# Altium PCB analog_breakout_IMU.PcbDoc
Units mil, origin at the board's own origin, x right, y up, seen from the top; angles counter-clockwise.
Board outline 1350 x 2525 mil, 4 copper layers (Top Layer, Layer 1, Layer 2, Bottom Layer), stack 22.378 mil thick; 81 components, 75 nets, 356 pads, 135 vias.
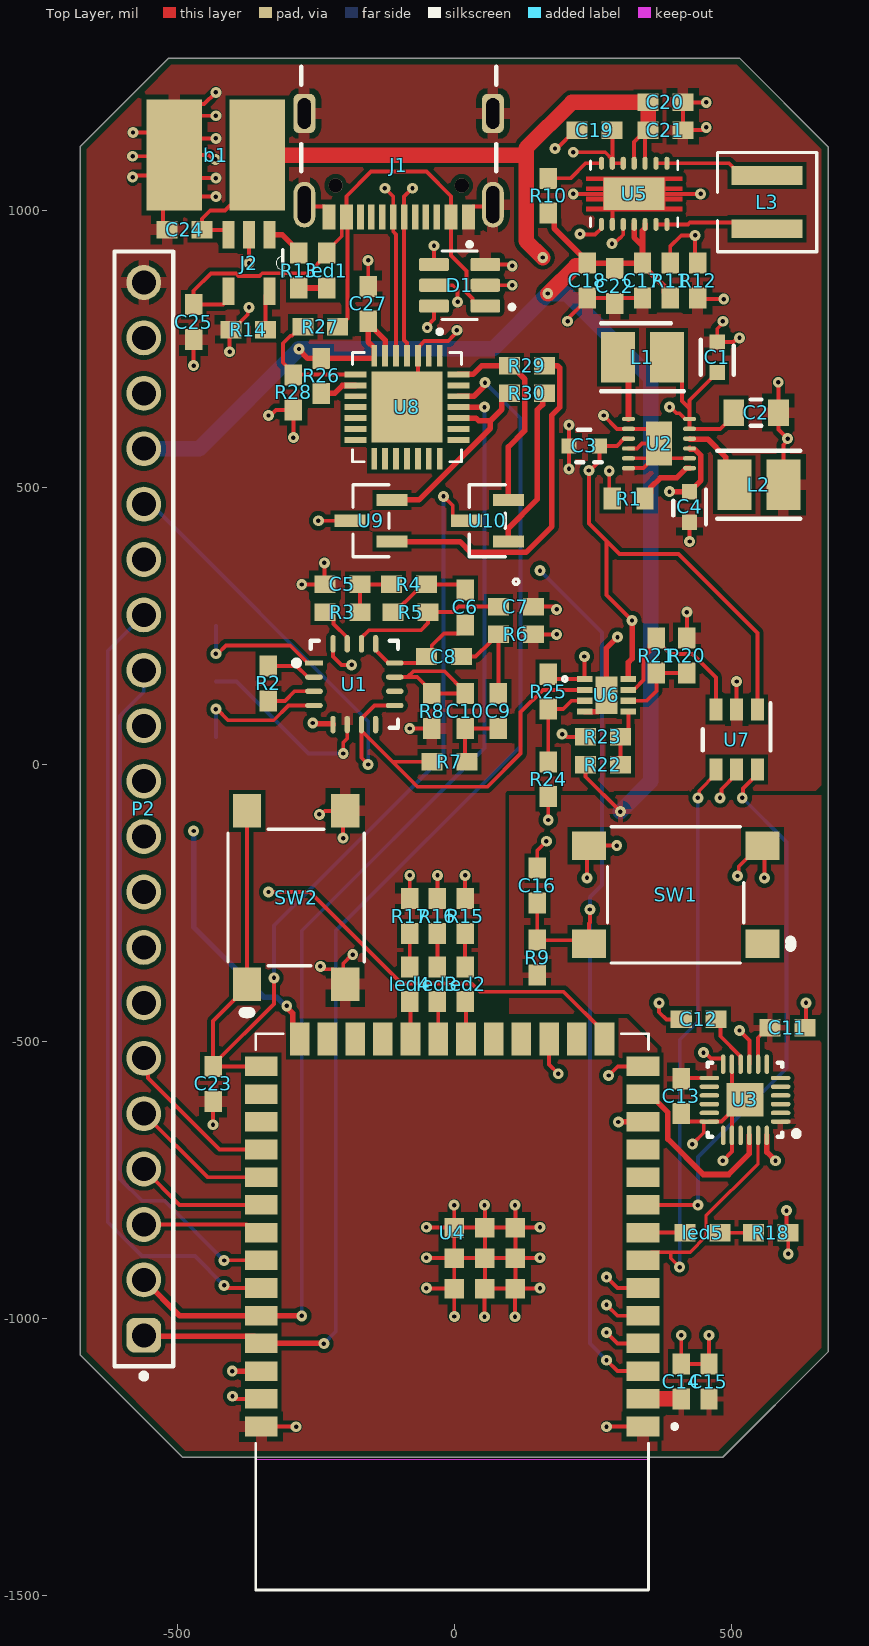
[diagram p0: Top Layer view]
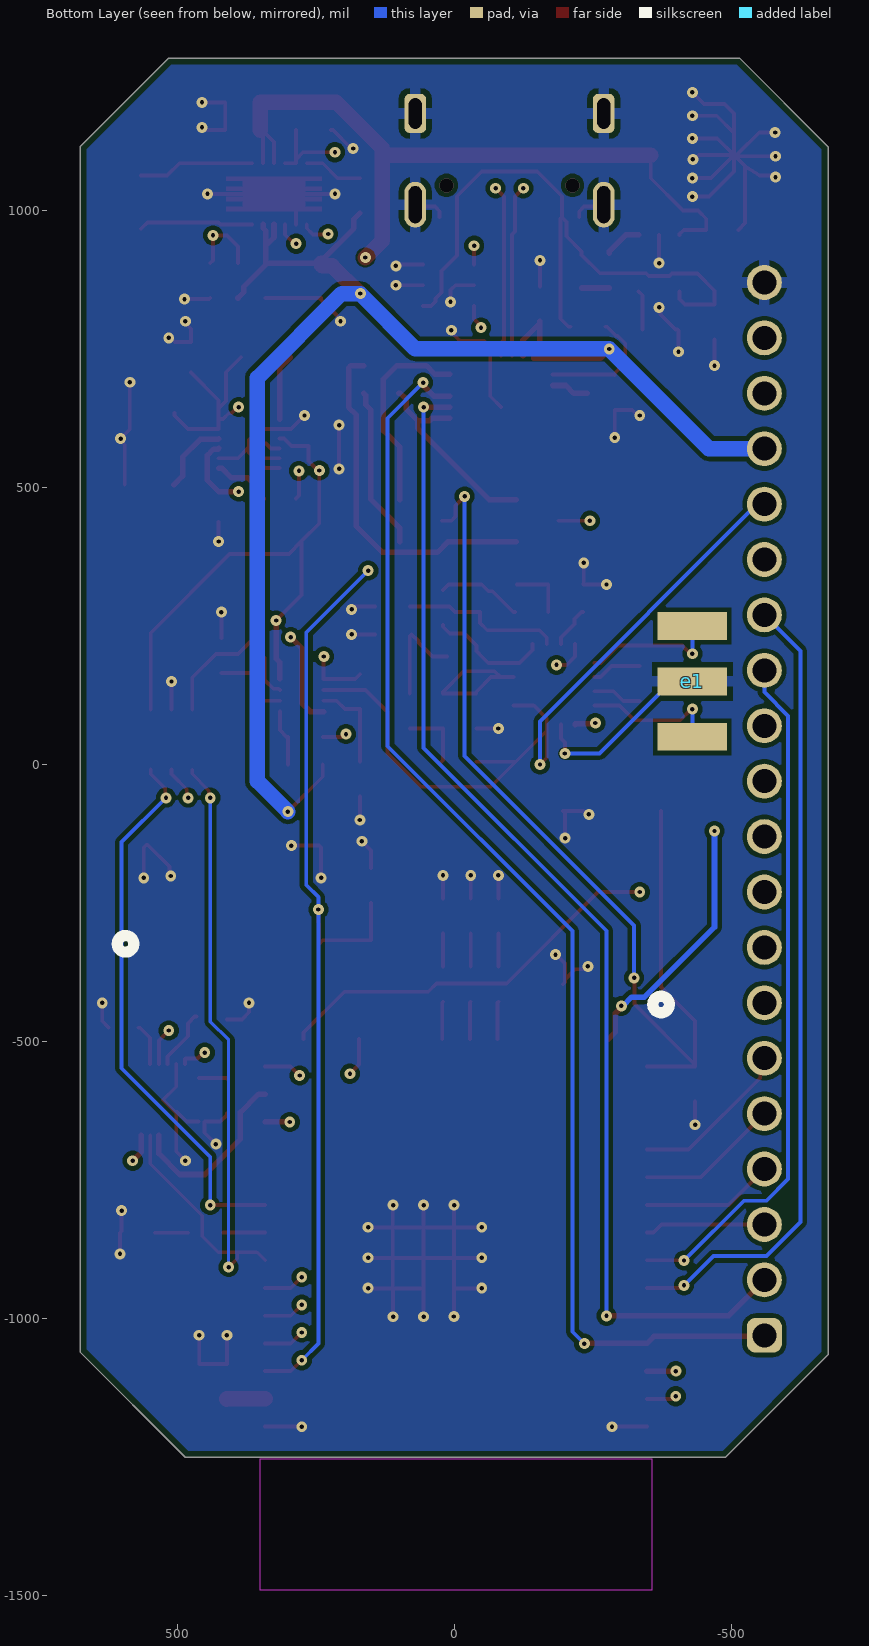
[diagram p1: Bottom Layer view, seen from below]
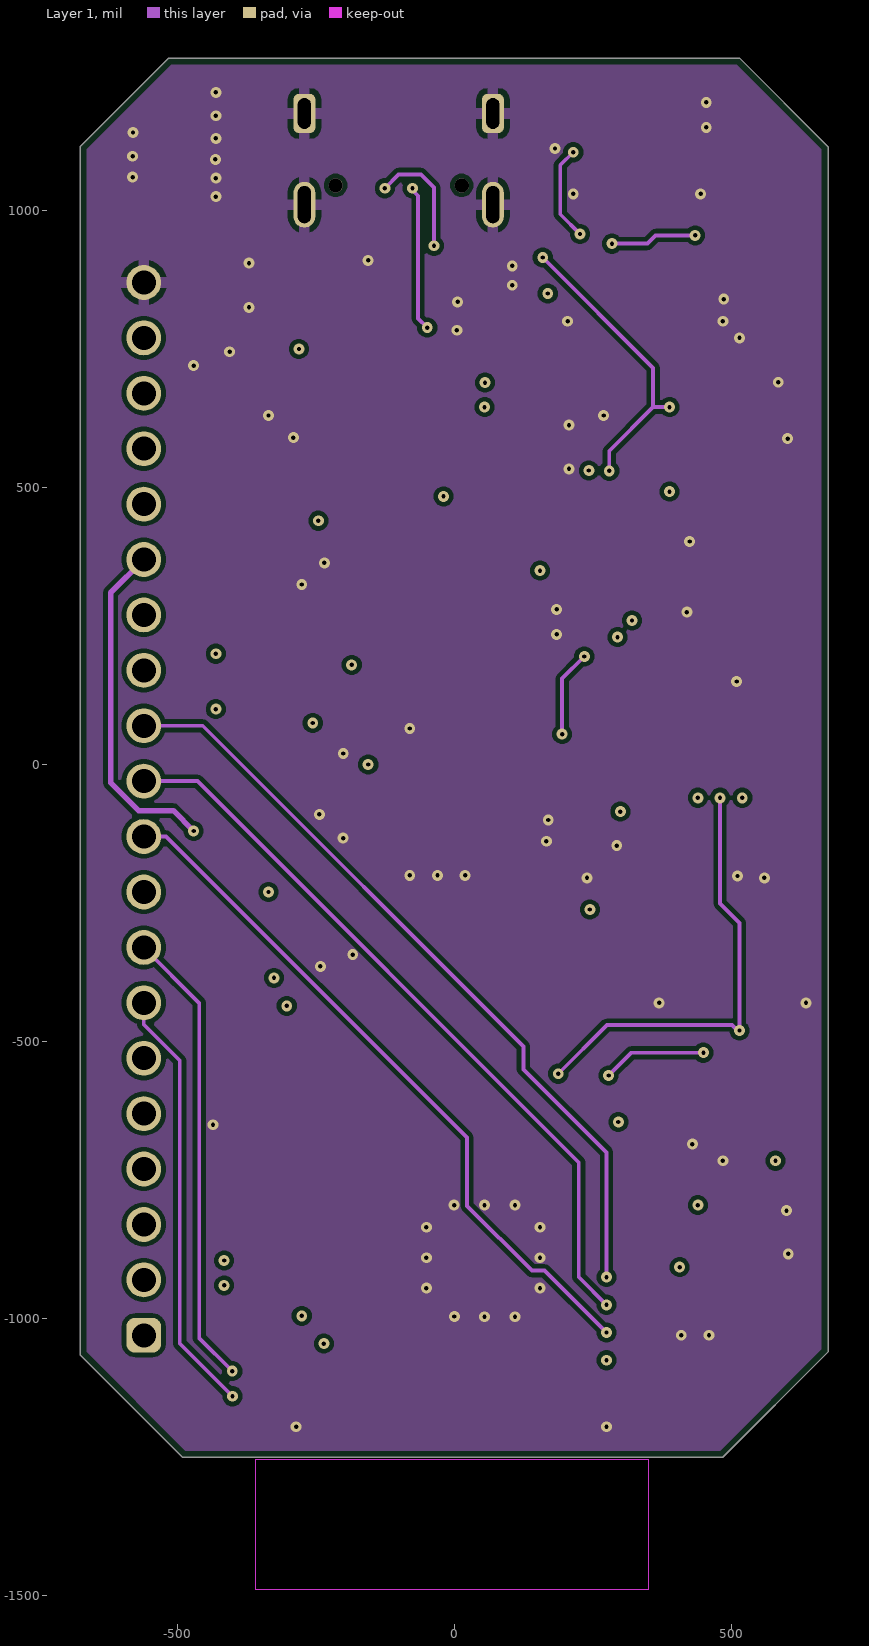
[diagram p2: Layer 1]
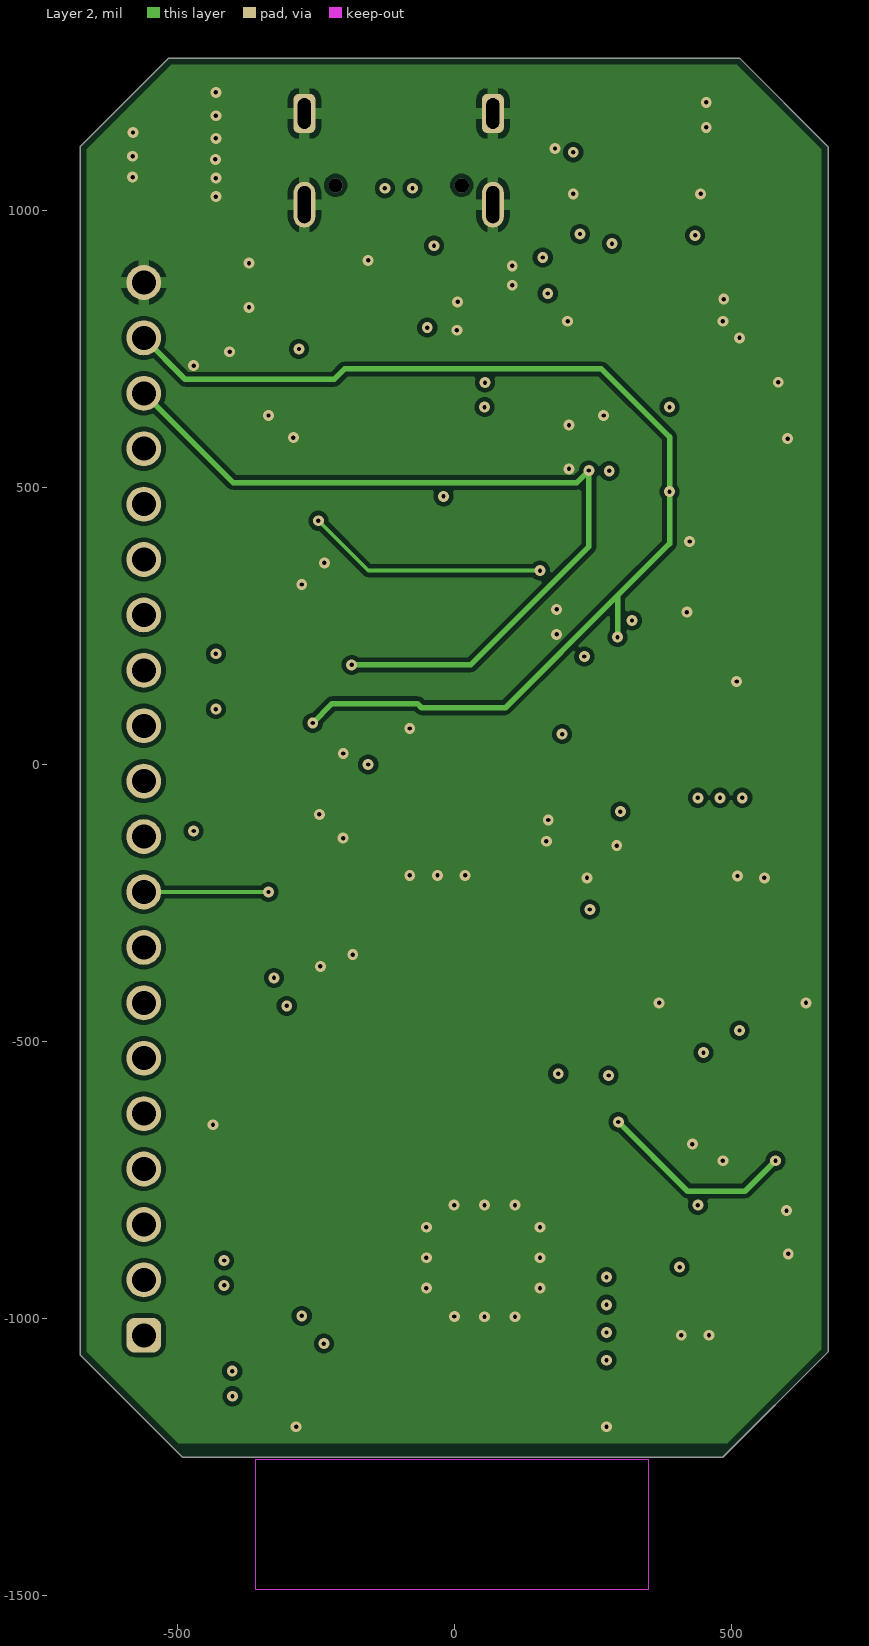
[diagram p3: Layer 2]

## Layer stack, top to bottom
Top Solder: solder mask 0.4, Solder Resist, Dk 3.5
Top Layer: signal copper 1.4
Dielectric 2: prepreg 2.8, PP-006, Dk 4.1
Layer 1: signal copper 0.689
Dielectric 1: dielectric 12.6, FR-4, Dk 4.8
Layer 2: signal copper 0.689
Dielectric 3: prepreg 2.8, PP-006, Dk 4.1
Bottom Layer: signal copper 1.4
Bottom Solder: solder mask 0.4, Solder Resist, Dk 3.5

## Board outline
-675,-1065 -675,1115 -515,1275 515,1275 675,1115 675,-1060 485,-1250 -490,-1250

## Design rules (kind name [scope] priority, off if disabled: settings)
BoardOutlineClearance [All] p1: gap=11.81 ignorepadtopadclearanceinfootprint=FALSE except(15.75: Arc-SplitBarrior Arc-SplitContinuation Track-SplitBarrior Track-SplitContinuation SMDPad-SplitBarrior SMDPad-SplitContinuation THPad-SplitBarrior THPad-SplitContinuation Via-SplitBarrior Via-SplitContinuation Fill-SplitBarrior Fill-SplitContinuation Poly-SplitBarrior Poly-SplitContinuation Region-SplitBarrior Region-SplitContinuation Text-SplitBarrior Text-SplitContinuation)
Clearance "Clearance Different Nets" [All] p1: gap=7.87 ignorepadtopadclearanceinfootprint=FALSE except(3.5: Arc-Arc Arc-Track Arc-SMDPad Track-Track Track-SMDPad; 5: SMDPad-SMDPad SMDPad-Via THPad-Via Via-Via; 10: Arc-Via Arc-Text Track-Via Track-Text SMDPad-Text THPad-Text Via-Text Fill-Text Poly-Text Region-Text Text-Text; 19.68: THPad-THPad Via-Hole)
Clearance "Clearance Same Nets" [All] p2: gap=7.87 ignorepadtopadclearanceinfootprint=FALSE except(3.5: Arc-Arc Arc-Track Arc-SMDPad Track-Track Track-SMDPad SMDPad-SMDPad; 5: SMDPad-Via THPad-Via; 10: Arc-Via Arc-Text Track-Via Track-Text SMDPad-Text THPad-Text Via-Via Via-Text Fill-Text Poly-Text Region-Text Text-Text)
Clearance "Clearance Bottom Layer" [OnLayer('Bottom Layer')] p3: gap=8 ignorepadtopadclearanceinfootprint=TRUE except(10: Arc-Text Track-Text SMDPad-Text THPad-Text Via-Text Fill-Text Poly-Text Region-Text Text-Text)
Clearance "Clearance Top Layer" [OnLayer('Top Layer')] p4: gap=8 ignorepadtopadclearanceinfootprint=TRUE except(10: Arc-Text Track-Text SMDPad-Text THPad-Text Via-Text Fill-Text Poly-Text Region-Text Text-Text)
HoleSize [All] p1: absolutevalues=TRUE maxlimit=248.03 minlimit=7.87 maxpercent=80.000 minpercent=20.000
MinimumAnnularRing [All] p1: minimumring=5.12
MinimumSolderMaskSliver [All] p1: minsoldermaskwidth=3.94
PolygonConnect PolygonConnect_2 [All vs IsNamedPolygon('3V3_L01_P010')] p1: connectstyle=Relief reliefconductorwidth=10 reliefentries=4 polygonreliefangle="90 Angle" airgapwidth=10
PolygonConnect [All vs IsNamedPolygon('3V3_L01_P010')] p2: connectstyle=Direct reliefconductorwidth=10 reliefentries=4 polygonreliefangle="90 Angle" airgapwidth=10
PolygonConnect PolygonConnect_1 [All] p3: thpad.connectstyle=Relief thpad.reliefconductorwidth=20 thpad.reliefentries=4 thpad.polygonreliefangle="90 Angle" thpad.airgapwidth=10 smdpad.connectstyle=Relief smdpad.reliefconductorwidth=20 smdpad.reliefentries=4 smdpad.polygonreliefangle="90 Angle" smdpad.airgapwidth=10 via.connectstyle=Direct via.reliefconductorwidth=20 via.reliefentries=4 via.polygonreliefangle="90 Angle" via.airgapwidth=10
RoutingCorners [All] p1: cornerstyle=Round minsetback=100 maxsetback=100
RoutingVias [All] p1: holewidth=19.68 width=39.37 viastyle="Through Hole" minholewidth=7.87 minwidth=13.78 maxholewidth=39.37 maxwidth=78.74
SilkToSilkClearance [All] p1: silktosilkclearance=3.94
SilkToSolderMaskClearance [IsPad] p1: minsilkscreentomaskgap=3.94 clearancetoexposedcopper=TRUE
SolderMaskExpansion [All] p1: expansion=4 istentingtop=FALSE
SupplyNets "Schematic Supply Nets" [InNet('gnd')] p1: voltage=0.000
Width [All] p1: maxlimit=100 minlimit=3.5 preferedwidth=15
25 further rules are at their usual default settings.

## Classes and differential pairs
component class usb: C27 R26 R27 R28 R29 R30 U8 U9 U10
component class esp32: b1 C14 C15 C16 C17 C18 C19 C20 C21 C22 C23 C24 C25 D1 J1 J2 L3 led1 led2 led3 led4 led5 R9 R10 R11 R12 R13 R14 R15 R16 R17 R18 SW1 SW2 U4 U5 U7
component class analog: " " C1 C2 C3 C4 C5 C6 C7 C8 C9 C10 C11 C12 C13 e1 L1 L2 P2 R1 R2 R3 R4 R5 R6 R7 R8 R20 R21 R22 R23 R24 R25 U1 U2 U3 U6

## Components (designator, comment, footprint, x,y, rotation, side; value= is the part's Value field where it differs from the comment)
b1 "battery pad" bat_pads -455,1100 r270 top
C1 "10u" FP-C1608-080-0_1-MFG 475,735 r90 top
C2 "100n" FP-CGA3E-0_3-0_1-IPC_A 545,635 r0 top
C3 "10u" FP-C1608-080-0_1-MFG 235,575 r0 top
C4 "10u" FP-C1608-080-0_1-MFG 425,465 r90 top
C5 "genCap" GeneralCap -170,325 r180 top
C6 "genCap" GeneralCap 20,315 r270 top
C7 "genCap" GeneralCap 80,285 r0 top
C8 "genCap" GeneralCap -50,195 r0 top
C9 "genCap" GeneralCap 80,127.99 r270 top
C10 "genCap" GeneralCap 20,65 r90 top
C11 "genCap" GeneralCap 570,-475 r0 top
C12 "genCap" GeneralCap 472.99,-460 r180 top
C13 "genCap" GeneralCap 410,-567.01 r270 top
C14 "genCap" GeneralCap 410,-1145 r90 top
C15 "genCap" GeneralCap 460,-1145 r90 top
C16 "genCap" GeneralCap 150,-250 r90 top
C17 "genCap" GeneralCap 340,905 r270 top
C18 "genCap" GeneralCap 240,905 r270 top
C19 "genCap" GeneralCap 285,1145 r180 top
C20 "genCap" GeneralCap 350,1195 r0 top
C21 "genCap" GeneralCap 350,1145 r0 top
C22 "genCap" GeneralCap 290,895 r270 top
C23 "genCap" GeneralCap -435,-545 r270 top
C24 "genCap" GeneralCap -455,965 r180 top
C25 "genCap" GeneralCap -470,830 r270 top
C27 "genCap" GeneralCap -155,800 r90 top
D1 "ESDA6V1BC6" SOT95P280X145-6N 10,865 r180 top
e1 "electrode" electrode -430,150 r0 bottom
J1 "USB4105-GF-A-120" GCT_USB4105-GF-A-120 -100,1175 r180 top
J2 "MCP73831T-2ACI/OT" SOT95P280X145-5N -370,905 r270 top
L1 "1239AS-H-4R7M=P2" FP-DFE252012C-IPC_A 340,735 r180 top
L2 "1239AS-H-4R7M=P2" FP-DFE252012C-IPC_A 550,505 r0 top
L3 "XFL4020-152MEC" IND_XFL4020_COC 565,1015 r90 top
led1 "led" GeneralCap -230,922.99 r270 top
led2 "led" GeneralCap 20,-427.99 r90 top
led3 "led" GeneralCap -30,-427.99 r90 top
led4 "led" GeneralCap -80,-427.99 r90 top
led5 "led" GeneralCap 417.01,-845 r0 top
P2 "61302011121" 61302011121 -560,-80 r90 top
R1 "RC0603JR-070RL" RESC1608X55X25ML10T15 315,480 r0 top
R2 "genRes" GeneralCap -335,177.99 r270 top
R3 "genRes" GeneralCap -232.99,275 r0 top
R4 "genRes" GeneralCap -112.99,325 r0 top
R5 "genRes" GeneralCap -110,275 r0 top
R6 "genRes" GeneralCap 80,235 r0 top
R7 "genRes" GeneralCap 22.99,5 r180 top
R8 "genRes" GeneralCap -40,127.99 r270 top
R9 "genRes" GeneralCap 150,-317.01 r270 top
R10 "genRes" GeneralCap 170,995 r90 top
R11 "genRes" GeneralCap 390,842.01 r90 top
R12 "genRes" GeneralCap 440,905 r270 top
R13 "genRes" GeneralCap -280,860 r90 top
R14 "genRes" GeneralCap -402.99,785 r0 top
R15 "genRes" GeneralCap 20,-305 r90 top
R16 "genRes" GeneralCap -30,-305 r90 top
R17 "genRes" GeneralCap -80,-305 r90 top
R18 "genRes" GeneralCap 540,-845 r0 top
R20 "genRes" GeneralCap 420,165 r90 top
R21 "genRes" GeneralCap 365,227.99 r270 top
R22 "genRes" GeneralCap 237.01,0 r0 top
R23 "genRes" GeneralCap 237.01,50 r0 top
R24 "genRes" GeneralCap 170,5 r270 top
R25 "genRes" GeneralCap 170,100 r90 top
R26 "genRes" GeneralCap -240,670 r90 top
R27 "genRes" GeneralCap -210,790 r180 top
R28 "genRes" GeneralCap -290,702.99 r270 top
R29 "genRes" GeneralCap 100,720 r0 top
R30 "genRes" GeneralCap 100,670 r0 top
SW1 "PTS645SH50SMTR92LFS" PTS645S_SMTR92_CNK 400,-235 r180 top
SW2 "PTS645SH50SMTR92LFS" PTS645S_SMTR92_CNK -285,-240 r90 top
U1 "AD8295BCPZ-WP" FP-CP-16-19-IPC_C -180,145 r0 top
U2 "TPS65133DPDR" FP-DPD0012A-MFG 369.88,579.29 r0 top
U3 "MPU-9250" INSE-QFN-24-1700X1540TP_M 525,-605 r180 top
U4 "ESP32-S3-WROOM-1-N16R2" XCVR_ESP32-S3-WROOM-1-N16R2 -3.54,-987.6 r180 top locked
U5 "TPS63021DSJR" IC_TPS63021DSJR 325,1030 r90 top
U6 "OPA2990IDSGR" WSON8_DSG_TEX 275,125 r0 top
U7 "ADC121S021CIMFXNOPB" DBV0006A_N 510,45 r270 top
U8 "CP2102N-A02-GQFN28" QFN50P500X500X80-29N -85,645 r270 top
U9 "KSC3265YMTF" SOT-23_ONS -150,440 r90 top
U10 "KSC3265YMTF" SOT-23_ONS 60,440 r90 top

## Footprints (in the part's own frame and the unit in brackets; to place one, negate y for a bottom-side part, rotate by r counter-clockwise, add the part's x,y. Pads: shape width x height; smd on the part's side, far side on the other; paste and mask are expansions set on the pad)
61302011121 [mm] "Pin Header, pitch 2.54 mm, THT, Vertical, single row, 20p"
  rrect50% 1.6x1.6 hole 1.1: 1(-24.13,0)
  round 1.6 hole 1.1: 2(-21.59,0) 3(-19.05,0) 4(-16.51,0) 5(-13.97,0) 6(-11.43,0) 7(-8.89,0) 8(-6.35,0) 9(-3.81,0) 10(-1.27,0) 11(1.27,0) 12(3.81,0) 13(6.35,0) 14(8.89,0) 15(11.43,0) 16(13.97,0) 17(16.51,0) 18(19.05,0) 19(21.59,0) 20(24.13,0)
  silkscreen extent -26.12,-1.35 25.55,1.35, body extent -25.4,-1.27 25.4,1.27, height 8.57
bat_pads [mil]
  rect 200x100 smd: bv+(0,100) bv-(0,-50)
DBV0006A_N [mm]
  rect 1x0.6 smd paste+0 mask+0.051: 1(-1.375,0.95) 2(-1.375,0) 3(-1.375,-0.95) 4(1.375,-0.95) 5(1.375,0) 6(1.375,0.95)
  silkscreen extent -1.68,-1.55 0.5,1.55
electrode [mil]
  rect 125x50 smd: in+(0,100) in-(0,-100) ref(0,0)
FP-C1608-080-0_1-MFG [mm]
  rect 0.7x0.7 smd paste+0 mask+0: 1(-0.7,0) 2(0.7,0)
  silkscreen extent -0.8,-0.75 0.8,0.75, body extent -1.15,-0.55 1.15,0.55, height 0.25
FP-CGA3E-0_3-0_1-IPC_A [mm]
  rect 0.956x1.206 smd paste+0 mask+0: 1(-1.025,0) 2(1.025,0)
  silkscreen extent -0.25,-0.6 0.25,0.6, body extent -2,-1.1 2,1.1, height 0.25
FP-CP-16-19-IPC_C [mm]
  rect 0.81x0.242 smd paste+0 mask+0: 1(-1.851,0.975)
  rrect100% 0.81x0.242 smd paste+0 mask+0: 2(-1.851,0.325) 3(-1.851,-0.325) 4(-1.851,-0.975) 9(1.851,-0.975) 10(1.851,-0.325) 11(1.851,0.325) 12(1.851,0.975)
  rrect100% 0.242x0.81 smd paste+0 mask+0: 5(-0.975,-1.851) 6(-0.325,-1.851) 7(0.325,-1.851) 8(0.975,-1.851) 13(0.975,1.851) 14(0.325,1.851) 15(-0.325,1.851) 16(-0.975,1.851)
  silkscreen extent -2.78,-2 2,2, body extent -2.36,-2.36 2.36,2.36, height 0.25
FP-DFE252012C-IPC_A [mil]
  rect 61.22x90.8 smd paste+0 mask+0: 1(-44.32,0) 2(44.32,0)
  silkscreen extent -75,-61 75,61, body extent -95,-65 95,65, height 10
FP-DPD0012A-MFG [mm]
  rrect100% 0.6x0.2 smd paste+0 mask+0: 1(-1.4,1.125) 2(-1.4,0.675) 3(-1.4,0.225) 4(-1.4,-0.225) 5(-1.4,-0.675) 6(-1.4,-1.125) 7(1.4,-1.125) 8(1.4,-0.675) 9(1.4,-0.225) 10(1.4,0.225) 11(1.4,0.675) 12(1.4,1.125)
  rect 1.21x2.02 smd paste-1000 mask+0: 13(0,0)
  body extent -1.8,-1.65 1.8,1.65, height 0.25
GCT_USB4105-GF-A-120 [mm]
  rect 0.6x1.15 smd: A1_B12(-3.2,4.755) A4_B9(-2.4,4.755) B1_A12(3.2,4.755) B4_A9(2.4,4.755)
  rect 0.3x1.15 smd: A5(-1.25,4.755) A6(-0.25,4.755) A7(0.25,4.755) A8(1.25,4.755) B5(1.75,4.755) B6(0.75,4.755) B7(-0.75,4.755) B8(-1.75,4.755)
  oval 1x2.1 hole 0.6 slot 1.7 at 90 deg: SH1(-4.32,4.18) SH2(4.32,4.18)
  rrect50% 1x1.8 hole 0.6 slot 1.4 at 90 deg: SH3(-4.32,0) SH4(4.32,0)
  round 0.65 hole 0.65 unplated: ""(-2.89,3.299) ""(2.89,3.299)
  silkscreen extent -4.47,-2.14 4.47,6.1, body extent -4.47,-2.6 4.47,5.11, height 3.31
GeneralCap [mm]
  rect 0.965x0.8 smd: 1(0,0) 2(1.6,0)
  body extent -0.58,-0.5 2.17,0.5, height 0.5
IC_TPS63021DSJR [mm]
  oval 0.6x0.24 smd mask+0: 1(-1.4,1.5) 2(-1.4,1) 3(-1.4,0.5) 4(-1.4,0) 5(-1.4,-0.5) 6(-1.4,-1) 7(-1.4,-1.5) 8(1.4,-1.5) 9(1.4,-1) 10(1.4,-0.5) 11(1.4,0) 12(1.4,0.5) 13(1.4,1) 14(1.4,1.5)
  rect 1.5x2.8 smd paste-2 mask+0: 15(0,0)
  Top Layer region: 0.79,-2.2 0.59,-2.2 0.59,-1.425 0.33,-1.425 0.33,-2.2 0.13,-2.2 0.13,-1.425 -0.13,-1.425 -0.13,-2.2 -0.33,-2.2 -0.33,-1.425 -0.59,-1.425 -0.59,-2.2 -0.79,-2.2 -0.79,2.2 -0.59,2.2 -0.59,1.425 -0.33,1.425 -0.33,2.2 -0.13,2.2 -0.13,1.425 0.13,1.425 0.13,2.2 0.33,2.2 0.33,1.425 0.59,1.425 0.59,2.2 0.79,2.2
  silkscreen extent -1.5,-2 1.5,2
IND_XFL4020_COC [mil]
  rect 34x128 smd paste+0 mask+0: 1(-48,0) 2(48,0)
  silkscreen extent -90,-90 90,90, body extent -84,-84 84,84, height 83
INSE-QFN-24-1700X1540TP_M [mm] "QFN, 24-Leads, Body 3.1x3.1mm, Pitch 0.40mm, Thermal Pad 1.54x1.70mm, IPC Low Density"
  oval 0.9x0.2 smd: 1(-1.632,1) 2(-1.632,0.6) 3(-1.632,0.2) 4(-1.632,-0.2) 5(-1.632,-0.6) 6(-1.632,-1) 13(1.632,-1) 14(1.632,-0.6) 15(1.632,-0.2) 16(1.632,0.2) 17(1.632,0.6) 18(1.632,1)
  oval 0.2x0.9 smd: 7(-1,-1.632) 8(-0.6,-1.632) 9(-0.2,-1.632) 10(0.2,-1.632) 11(0.6,-1.632) 12(1,-1.632) 19(1,1.632) 20(0.6,1.632) 21(0.2,1.632) 22(-0.2,1.632) 23(-0.6,1.632) 24(-1,1.632)
  rect 1.7x1.54 smd: 25(0,0)
  silkscreen extent -2.48,-1.7 1.7,1.7, body extent -1.55,-1.55 1.55,1.55, height 1.05
PTS645S_SMTR92_CNK [mil]
  rect 61x51 smd paste+0 mask+0: 1(-156.5,88.58) 2(156.5,88.58) 3(-156.5,-88.58) 4(156.5,-88.58)
  silkscreen extent -208,-123 123,123
QFN50P500X500X80-29N [mm]
  rect 0.99x0.27 smd mask+0: 1(-2.36,1.5) 2(-2.36,1) 3(-2.36,0.5) 4(-2.36,0) 5(-2.36,-0.5) 6(-2.36,-1) 7(-2.36,-1.5) 15(2.36,-1.5) 16(2.36,-1) 17(2.36,-0.5) 18(2.36,0) 19(2.36,0.5) 20(2.36,1) 21(2.36,1.5)
  rect 0.27x0.99 smd mask+0: 8(-1.5,-2.36) 9(-1,-2.36) 10(-0.5,-2.36) 11(0,-2.36) 12(0.5,-2.36) 13(1,-2.36) 14(1.5,-2.36) 22(1.5,2.36) 23(1,2.36) 24(0.5,2.36) 25(0,2.36) 26(-0.5,2.36) 27(-1,2.36) 28(-1.5,2.36)
  rect 3.25x3.25 smd paste-0.597 mask+0: 29(0,0)
  silkscreen extent -3.55,-2.5 2.5,2.5, body extent -2.5,-2.5 2.5,2.5, height 0.38
RESC1608X55X25ML10T15 [mm] "Chip Resistor, 2-Leads, Body 1.60x0.80mm, IPC Low Density"
  rect 0.8x1 smd: 1(-0.75,0) 2(0.75,0)
  body extent -0.85,-0.45 0.85,0.45, height 0.55
SOT95P280X145-5N [mil]
  rect 50x22 smd: 1(-51,37) 2(-51,0) 3(-51,-37) 4(51,-37) 5(51,37)
  silkscreen extent -24,49 24,61, body extent -53,-57 53,57, height 57
SOT95P280X145-6N [mm]
  rrect25% 1.36x0.6 smd: 1(-1.175,0.95) 2(-1.175,0) 3(-1.175,-0.95) 4(1.175,-0.95) 5(1.175,0) 6(1.175,0.95)
  silkscreen extent -2.5,-1.56 0.81,1.56, body extent -1.4,-1.46 1.4,1.46, height 0.4
SOT-23_ONS [mil]
  rect 22x56 smd paste+0 mask+0: 1(-37.5,-38) 2(37.5,-38) 3(0,38)
  silkscreen extent -65,-33 65,33, body extent -60,-52 60,52, height 44
WSON8_DSG_TEX [mil]
  rect 28x11 smd paste+0 mask+0: 1(-39.5,29.53) 2(-39.5,9.84) 3(-39.5,-9.84) 4(-39.5,-29.53) 5(39.5,-29.53) 6(39.5,-9.84) 7(39.5,9.84) 8(39.5,29.53)
  rect 39x67 smd paste+0 mask+0: 9(0,0)
  silkscreen extent -79,26 -71,34, body extent -41,-41 41,41, height 32
XCVR_ESP32-S3-WROOM-1-N16R2 [mm]
  rect 1.5x0.9 smd: 2(-8.75,3.99) 3(-8.75,2.72) 4(-8.75,1.45) 5(-8.75,0.18) 6(-8.75,-1.09) 7(-8.75,-2.36) 8(-8.75,-3.63) 9(-8.75,-4.9) 10(-8.75,-6.17) 11(-8.75,-7.44) 12(-8.75,-8.71) 13(-8.75,-9.98) 14(-8.75,-11.25) 27(8.75,-11.25) 28(8.75,-9.98) 29(8.75,-8.71) 30(8.75,-7.44) 31(8.75,-6.17) 32(8.75,-4.9) 33(8.75,-3.63) 34(8.75,-2.36) 35(8.75,-1.09) 36(8.75,0.18) 37(8.75,1.45) 38(8.75,2.72) 39(8.75,3.99) GND(-8.75,5.26) GND(8.75,5.26)
  rect 0.9x1.5 smd: 15(-6.985,-12.5) 16(-5.715,-12.5) 17(-4.445,-12.5) 18(-3.175,-12.5) 19(-1.905,-12.5) 20(-0.635,-12.5) 21(0.635,-12.5) 22(1.905,-12.5) 23(3.175,-12.5) 24(4.445,-12.5) 25(5.715,-12.5) 26(6.985,-12.5)
  rect 0.9x0.9 smd: GND(-2.9,-1.06) GND(-2.9,-3.86) GND(-2.9,-2.46) GND(-1.5,-1.06) GND(-1.5,-2.46) GND(-1.5,-3.86) GND(-0.1,-1.06) GND(-0.1,-2.46) GND(-0.1,-3.86)
  Keep-Out Layer region: 9,6.75 -9,6.75 -9,12.75 9,12.75
  Keep-Out Layer region: 9,6.75 -9,6.75 -9,12.75 9,12.75
  silkscreen extent -10.3,-12.75 9,12.75, body extent -9,-12.75 9,12.75, height 3.25

## Part data
C1: library part CMP-2000-04979-3, "C19702", Capacitance=10uF, Case Code (Imperial)=0603, Case Code (Metric)=1608, Dielectric=X5R, Dielectric Material=Ceramic, Max Operating Temperature=85°C, Min Operating Temperature=-55°C, Package Quantity=1, Tolerance=10%, Voltage=10V, Case/Package=0603, Construction=Flat, Depth=0.8mm, Height=0.8mm, Lead Free="Lead Free", Length=1.6mm, Mount="Surface Mount", Number of Pins=2, Packaging="Tape and Reel", Radiation Hardening=No, REACH SVHC="No SVHC", Resistor Type=Ceramic, RoHS Compliant=Yes, Series=C, Termination=SMD/SMT, Thickness=0.035inch, Voltage Rating=10V, Voltage Rating (DC)=10V, Weight=7.1E-05oz, Width=0.8mm
C2: library part CMP-2000-07546-2, "C14663", Capacitance=100nF, Case Code (Imperial)=0603, Case Code (Metric)=1608, Dielectric=X7R, Max Operating Temperature=125°C, Min Operating Temperature=-55°C, Package Quantity=1, Ratings=AEC-Q200, Tolerance=10%, Voltage=50V, Case/Package=0603, Composition=Ceramic, Depth=0.8mm, Height=0.8mm, Lead Free="Lead Free", Length=1.6mm, Mount="Surface Mount", Packaging="Tape and Reel", Radiation Hardening=No, REACH SVHC="No SVHC", Termination=SMD/SMT, Thickness=0.035inch, Voltage Rating=50V, Voltage Rating (DC)=50V, Weight=7.1E-05oz, Width=0.8mm
C3 C4: library part CMP-2000-04979-3, "C6119842", Capacitance=10uF, Case Code (Imperial)=0603, Case Code (Metric)=1608, Dielectric=X5R, Dielectric Material=Ceramic, Max Operating Temperature=85°C, Min Operating Temperature=-55°C, Package Quantity=1, Tolerance=10%, Voltage=10V, Case/Package=0603, Construction=Flat, Depth=0.8mm, Height=0.8mm, Lead Free="Lead Free", Length=1.6mm, Mount="Surface Mount", Number of Pins=2, Packaging="Tape and Reel", Radiation Hardening=No, REACH SVHC="No SVHC", Resistor Type=Ceramic, RoHS Compliant=Yes, Series=C, Termination=SMD/SMT, Thickness=0.035inch, Voltage Rating=10V, Voltage Rating (DC)=10V, Weight=7.1E-05oz, Width=0.8mm
C5 C12 C13 C15 C16 C19 C23: "C14663"
  C5 C12 C13 C15 C16 C23: C=0.1u
  C19: C=100n
C6: "C107093", C=47n
C7: "C162241", C=6.8n
C8: "C694504", C=0.68u
C9 C10: "C107098", C=68n
C11: "C100042", C=10n
C14 C17 C18 C22: "C86295", C=22u
C20 C21 C27: "C6119842", C=10u
C24 C25: "C19666", C=4.7u
D1: "C495220", Package="SOT-23-6 STMicroelectronics", Availability="In Stock", Check_prices=https://www.snapeda.com/parts/ESDA6V1BC6/STMicroelectronics/view-part/?ref=eda, MF=STMicroelectronics, MP=ESDA6V1BC6, Price=None, Purchase-URL=https://pricing.snapeda.com/search/part/ESDA6V1BC6/?ref=eda, SnapEDA_Link=https://www.snapeda.com/parts/ESDA6V1BC6/STMicroelectronics/view-part/?ref=snap
J1 U5: Package=None
  J1: Check_prices=https://www.snapeda.com/parts/USB4105GFA120/Global+Connector+Technology/view-part/?ref=eda, MF="Global Connector Technology", MP=USB4105GFA120, SnapEDA_Link=https://www.snapeda.com/parts/USB4105GFA120/Global+Connector+Technology/view-part/?ref=snap
  U5: Availability=Unavailable, MP=TPS63021DSJR, Price=None
J2: "C424093", Package="SOT-23 Microchip", Availability="In Stock", Check_prices=https://www.snapeda.com/parts/MCP73831T-2ACI/OT/Microchip/view-part/?ref=eda, MF=Microchip, MP=MCP73831T-2ACI/OT, Price=None, Purchase-URL=https://pricing.snapeda.com/search/part/MCP73831T-2ACI/OT/?ref=eda, SnapEDA_Link=https://www.snapeda.com/parts/MCP73831T-2ACI/OT/Microchip/view-part/?ref=snap
L1 L2: library part CMP-06042-003985-1, "C882976", Case Code (Imperial)=1008, Case Code (Metric)=2520, Current Rating=1.5A, DC Resistance (DCR)=240mR, inductance=4.7uH, Max Operating Temperature=85°C, Min Operating Temperature=-40°C, Resistor Type=Wirewound, Test Frequency=1MHz, Tolerance=20%, Case/Package=1008, Core Material=Ferrite, Height - Seated (Max)=0.047inch, Length=0.098inch, Mount="Surface Mount", Packaging="Tape and Reel", Shielding=Shielded, Width=0.079inch
L3: "C3033018", Mfr_Name=Coilcraft, Type="Fixed Inductors"
led1 led2 led3 led4 led5: library part genCap, "C965799", C=?
P2: library part CMP-1502-01102-3, Color=Black, Contact Resistance=20mΩ, Current Rating=3A, Operating Supply Voltage=250V, Connector Type="Male Pin", Contact Material=Copper, Contact Mating Length=5.9944mm, Contact Plating=Gold, Gender=Male, Lead Pitch=2.54mm, Mount="Through Hole", NexarPartId=32855554, Number of Contacts=20, Number of Pins=20, Number of Positions=20, Number of Rows=1, Orientation=Vertical, Packaging=Bulk, Pitch=2.54mm, REACH SVHC=Unknown, RoHS=Compliant, Termination=Solder
R1: library part CMP-2100-03667-1, "C95177", Case Code (Imperial)=0603, Case Code (Metric)=1608, Manufacturer=Yageo, Max Operating Temperature=155degC, Min Operating Temperature=-55degC, Package Description="2-Pin Surface Mount Device, Body 1.6 x 0.8 mm", Package Quantity=5000, Power Rating=100mW, Resistance=0mOhm, Temperature Coefficient=200ppm/degreesC, Tolerance=5%, Voltage Rating=50V, Case/Package=0603, Composition=ThickFilm, Contact Plating=Tin, Datasheet URL=http://www.yageo.com/NewPortal/yageodocoutput?fileName=/pdf/R-Chip/PYu-RC_Group_51_RoHS_L_5.pdf, Datasheet Version="Rev. 5, 10/2016", Depth=0.8mm, Height=0.45mm, Lead Free=LeadFree, Length=1.6mm, Manufacturer URL=http://www.yageo.com/, Military Standard=Not, Number of Pins=2, Package Reference=0603, Packaging=TapeandReel, Radiation Hardening=No, REACH SVHC=NoSVHC, RoHSCompliant=true, Termination=SMD/SMT, Voltage Rating (DC)=50V, Width=0.8mm
R2: "C105588", R=100
R3: "C137801", R=11k
R4: "C2906984", R=110k
R5: "C4216", R=33k
R6: "C2088918", R=4.3k
R7: "C2907015", R=22k
R8 R20 R21 R22 R23: "C14675", R=100k
R9 R29 R30: "C98220", R=10k
R10 R11: "C105578", R=1M
R12: "C123419", R=180k
R13 R15 R16 R17 R18: "C844932", R=50
R14: "C22975", R=2k
R24: "C2906993", R=150k
R25: "C2849084", R=750k
R26: "C22548", R=1k
R27: "C137768", R=22.1k
R28: "C705990", R=47.5k
SW1 SW2: "C221869", Mfr_Name="C&K Components", RefDes=RefDes, Type="Tactile Switches"
U1: library part CMP-09116-000488-1, "IC INST AMP 3 CIRCUIT 16LFCSP", Case/Package=VQFN, Dual Supply Voltage=9V, Input Bias Current=800pA, Input Offset Voltage (Vos)=120uV, Input Resistance=100GR, Max Dual Supply Voltage=18V, Max Operating Temperature=85°C, Min Dual Supply Voltage=2.3V, Min Operating Temperature=-40°C, Nominal Supply Current=2mA, Operating Supply Current=2.3mA, Output Current per Channel=18mA, Package Quantity=64, Power Supply Rejection Ratio (PSRR)=150dB, Voltage Gain=60dB, -3db Bandwidth=1.2MHz, Amplifier Type="INSTRUMENTATION AMPLIFIER", Bandwidth=1.2MHz, Common Mode Rejection Ratio=140dB, Contact Plating=Tin, Gain Bandwidth Product=1MHz, Height=0.83mm, Lead Free="Contains Lead", Length=4mm, Max Supply Voltage=18V, Min Supply Voltage=2.3V, Mount="Surface Mount", Number of Amplifiers=2, Number of Channels=3, Number of Circuits=3, Number of Elements=1, Number of Pins=16, Packaging=Waffle, Reach SVHC Compliant=Yes, RoHS Compliant=Yes, Series=-, Slew Rate=2V/µs, Supply Current=2mA, Width=4mm
U2: library part CMP-04918-000430-1, "C134100", Case/Package=QFN, Max Operating Temperature=85°C, Max Supply Voltage=5V, Min Operating Temperature=-40°C, Min Supply Voltage=2.9V, Output Voltage=-5V, Package Quantity=3000, Lead Free="Lead Free", Mount="Surface Mount", Number of Channels=2, Number of Outputs=2, Number of Pins=12, Packaging="Tape and Reel", Radiation Hardening=No, RoHS Compliant=Yes
U3: library part CMP-2100-03657-1, "9-axis MotionTracking device, 2.4 to 3,6 V, -40 to 85 degC, 24-Pin QFN, RoHS, Tape and Reel", Case/Package=QFN, Manufacturer=InvenSense, Max Operating Temperature=85degC, Max Supply Voltage=3.6V, Min Operating Temperature=-40degC, Min Supply Voltage=2.4V, Package Description="24-Pin Quad Flat No-lead Package, Body 3 x 3 mm, Pitch 0.4 mm", Package Quantity=1, Package Reference=QFN-24, Datasheet URL=http://datasheet.octopart.com/MPU-9250-InvenSense-datasheet-21859386.pdf, Datasheet Version="Rev. 1.0, 01/2014", Height=1mm, Length=3.1mm, Manufacturer URL=http://www.invensense.com/, Mount=SurfaceMount, RoHSCompliant=true, Width=3.1mm
U4: "C2913205", Package="NON STANDARD Espressif Systems", Check_prices=https://www.snapeda.com/parts/ESP32S3WROOM1N16R2/Espressif+Systems/view-part/?ref=eda, MF="Espressif Systems", MP=ESP32S3WROOM1N16R2, SnapEDA_Link=https://www.snapeda.com/parts/ESP32S3WROOM1N16R2/Espressif+Systems/view-part/?ref=snap
U6: "C2057874", Mfr_Name="Texas Instruments", RefDes=RefDes, Type=Type
U7: "C701596", Mfr_Name="Texas Instruments", RefDes=RefDes, Type=TYPE
U8: "C1550553", Package="WFQFN-28 Silicon Labs", Availability="In Stock", Check_prices=https://www.snapeda.com/parts/CP2102N-A02-GQFN28/Silicon+Labs/view-part/?ref=eda, MF="Silicon Labs", MP=CP2102N-A02-GQFN28, Price=None, Purchase-URL=https://pricing.snapeda.com/search/part/CP2102N-A02-GQFN28/?ref=eda, SnapEDA_Link=https://www.snapeda.com/parts/CP2102N-A02-GQFN28/Silicon+Labs/view-part/?ref=snap
U9 U10: "C14809", Mfr_Name=onsemi, RefDes=RefDes, Type=Type

## Via types
v1: diameter 19.68, hole 7.87, Top Layer to Bottom Layer, 135 vias

## Nets (pads, with @x,y where several pads share a name; then routed paths per layer and width w, separated by ;. In a path a pad name is that pad's centre, name@x,y a point inside that pad or via, vN(x,y) a via of type N, cw(c..) or ccw(c..) an arc to the next point about the centre after c; other vN are vias at no path point)
3v3: C11.1 C13.1 C14.1 C15.1 C17.1 C18.1 C22.1 C27.1 P2.17 R9.2 R10.1 R11.1 R22.1 R26.2 U3.1 U3.8 U3.13 U4.2 U5.4 U5.5 U8.6 U8.7 | length 3009.7
  Top Layer w7: R22.1 237.01,-22.01 v1(300,-85) ; C13.1 411.38,-565.63 U3.13 ; U3.8 548.62,-493.13 566.75,-475 C11.1
  Top Layer w10: v1(-280,750) -280,748.74 -264.25,732.99 R26.2 -144.37,732.99 -144.06,733.31 U8.7 -144.37,738.23 -144.37,752.4 -155,763.03 C27.1@-155,796.75 ; C27.1 C27.1@-155,796.75 ; U8.6 -124.37,766.12 C27.1@-155,796.75 ; R10.1 180.75,984.25 180.75,967.5 240,908.25 C18.1 C17.1 ; U5.4 325,951.17 340,936.17 ; U5.5 344.69,968.35 340,963.66 340,936.17 ; R11.1 379.25,852.76 379.25,862.5 340,901.75 C17.1 ; C17.1 340,936.17
  Top Layer w28: v1(169.02,850) 170,850 220,900 238.25,900 240,901.75 C18.1 ; U4.2 341.1,-1144.84 409.84,-1144.84 C14.1
  Bottom Layer w28: P2.17 -460,570 v1(-280,750) 70,750 169.02,849.02 v1(169.02,850) ; v1@169.51,849.51 170,850 202.86,850 355,697.86 355,-10 355,-30 v1(300,-85)
5v: C25.1 D1.1 J1.A4_B9 J1.B4_A9 J2.4 led1.1 R27.1 | length 1159.5
  Top Layer w7: J2.4 -407,840 -417,830 C25.1 -470,855 -439,886 -393.1,886 -388.76,881.66 -351.24,881.66 -346.24,886.66 -263.09,886.66 -230,919.74 led1.1 ; led1.1@-230,926.24 -202.8,953.44 -202.8,979.48 J1.B4_A9 ; R27.1 -206.75,790 -192.3,804.45 -192.3,985.61 J1.B4_A9 ; D1.1 41.77,827.6 33.46,835.91 33.46,841.05 22.49,852.02 22.49,890.41 -5.51,918.41 J1.A4_B9 -5.51,1025.51 -50,1070 -150,1070 -194.49,1025.51 J1.B4_A9
+in: e1.in+ U1.4 | length 246.4
  Top Layer w7: v1(-430,100) -428.17,100 -408.17,80 -325.36,80 -298.74,106.61 U1.4
  Bottom Layer w7: e1.in+ v1(-430,100)
-in: e1.in- U1.1 | length 246.4
  Top Layer w7: v1(-430,200) -426.57,200 -411.57,215 -295.66,215 -264.05,183.39 U1.1
  Bottom Layer w7: v1(-430,200) e1.in-
analog_out: P2.16 R7.2 U1.7 U1.9 U6.2 | length 1435.4
  Top Layer w7: v1(-155,0) -167.2,12.2 U1.7@-167.2,60.95 ; U1.9 -143.87,106.61 -167.2,83.28 U1.7 U1.7@-167.2,60.95 ; R7.2 -111.25,5 ; U6.2 160.2,134.84 120,94.64 120,20 60,-40 -66.25,-40 -111.25,5 ; U1.7@-167.2,60.95 -111.25,5
  Bottom Layer w7: P2.16 -546.99,470 -155,78.01 v1(-155,0)
analog_Pro: R21.1 U6.7 U7.3 | length 313.3
  Top Layer w7: U6.7 316.5,136.84 326.21,136.84 342.08,152.71 342.08,192.82 352.75,203.5 352.75,215.74 R21.1 ; R21.1@365,224.74 390.05,199.7 429.95,199.7 472.6,157.05 U7.3
avin: b1.bv+ C1.1 C2.1 C20.1 C21.1 C24.1 J2.3 L1.1 R1.1 U2.11 U2.12 U5.10 U5.11 | length 2343.9
  Top Layer w7: J2.3 -407,957.5 -414.5,965 C24.1 -455,985 -440,1000 -413.16,1000 -355,1058.16 b1.bv+ ; v1(280,530) 280,485.47 R1.1 ; U5.11 325,1123.25 346.75,1145 C21.1 344.69,1139.68 U5.10 ; L1.1 411.43,707.89 411.43,656.17 425,642.59 ; v1(388.84,645) 390.76,645 401.71,634.05 406.66,634.05 417.13,623.58 U2.12 ; C1.1 425,657.44 425,642.59 ; C2.1 504.65,630.08 480.43,605.87 U2.11 U2.12 ; U2.12 425,642.59
  Top Layer w28: b1.bv+ 130,1100 130,1112.49 ; v1(160,915) 130,945 130,1112.49 ; C21.1 C20.1 212.52,1195 130,1112.49
  Layer 1 w7: v1(160,915) 359.31,715.69 359.31,645 ; v1(280,530) 280,565.69 359.31,645 ; v1(388.84,645) 359.31,645
boot: C23.1 SW2.1 SW2.2 U4.27 U10.3 | length 1843.1
  Top Layer w7: SW2.2 SW2.1 -373.58,-401.5 -435,-462.91 C23.1@-435,-541.75 ; U4.27 -348.35,-545 C23.1 C23.1@-435,-541.75 ; v1(-325,-385) -325.3,-385.3 -325.3,-432.05 C23.1@-435,-541.75 ; v1(-19.01,484.01) -2.5,467.5 -2.5,447.5 5,440 U10.3
  Bottom Layer w7: v1(-325,-385) -325,-290.44 -19.01,15.55 v1(-19.01,484.01)
cs: U3.22 U4.13 | length 328.9
  Top Layer w10: U4.13 352.76,-594.68 385.75,-627.68 385.75,-675.88 449.71,-739.84 495.29,-739.84 532.87,-702.26 U3.22
cs_adc: U4.9 U7.6 | length 995.8
  Top Layer w7: U4.9 341.26,-795 v1(440,-795) ; v1(520,-60) 521.25,-58.75 521.25,-43.16 547.4,-17.01 U7.6
  Bottom Layer w7: v1(440,-795) 440,-708.01 600,-548.01 600,-140 v1(520,-60)
dtr: R29.1 U8.28 U10.2 | length 366.7
  Top Layer w10: U8.28 34.08,704.06 50.02,720 103.25,720 127.5,695.75 127.5,602.75 98,573.25 U10.2
en: C16.1 R9.1 SW1.2 U4.3 U9.3 | length 2287
  Top Layer w7: v1(-245,440) U9.3 ; C16.1 R9.1 236.93,-317.01 SW1.2 243.5,-286.5 245,-285 v1(245,-261.66) ; v1(275,-1075) 294.69,-1094.68 U4.3
  Layer 2 w7: v1(-245,440) -155,350 v1(155,350)
  Bottom Layer w7: v1(155,350) 266.85,238.15 266.85,-217.53 245,-239.37 245,-1045 v1(275,-1075)
fb: R11.2 R12.1 U5.3 | length 337.4
  Top Layer w7: v1(285,940) 288.43,940 298.28,949.85 299.1,949.85 305.31,956.07 U5.3 ; R11.2 390,935 410.04,955.04 v1(435.02,955.04) 435.02,909.98 R12.1
  Layer 1 w7: v1(285,940) 348.79,940 363.82,955.04 v1(435.02,955.04)
gnd: b1.bv- C1.2 C2.2 C3.1 C4.1 C5.2 C7.2 C11.2 C12.2 C13.2 C14.2 C15.2 C16.2 C17.2 C18.2 C19.2 C20.2 C21.2 C22.2 C23.2 C24.2 C25.2 C27.2 D1.2 D1.3 D1.5 e1.ref J1.A1_B12 J1.B1_A12 J1.SH1 J1.SH2 J1.SH3 J1.SH4 J2.2 L2.2 P2.20 R6.2 R8.2 R12.2 R14.1 R15.2 R16.2 R17.2 R18.2 R20.2 R24.2 R28.2 SW1.3 SW1.4 SW2.3 SW2.4 U1.6 U2.2 U2.4 U2.5 U2.6 U2.8 U2.13 U3.11 U3.18 U3.20 U3.25 U4.GND U5.2 U5.15 U7.2 U8.3 U8.29 | length 6690.7
  Top Layer w7: v1(-580.06,1097.78) -512.22,1097.78 b1.bv-@-510,1100 ; v1@-580,1055.65 v1(-580,1060) -576.92,1063.08 -551.5,1063.08 b1.bv-@-525,1080 ; v1(-579.44,1140.71) -550.71,1140.71 b1.bv-@-510,1100 ; P2.20@-560,874.35 P2.20 P2.20@-549.29,880.71 ; C24.2@-512.99,965 -525,977.01 b1.bv-@-525,1080 ; v1(-470,720) C25.2 ; v1(-435,-650) C23.2 ; v1(-430.91,1092.26) -434.34,1092.26 -442.08,1100 b1.bv- ; v1(-430,1025) -460,1025 -505,1070 b1.bv- ; v1(-430,1058.4) -463.4,1058.4 b1.bv- ; v1(-430,1130) -475,1130 b1.bv- ; v1(-430,1170.97) -474.03,1170.97 b1.bv-@-505,1140 ; v1(-430,1213.19) -451.08,1192.12 -487.88,1192.12 -505,1175 b1.bv-@-505,1140 ; v1(-405,745) -405,782.99 R14.1 ; R14.1@-399.74,785 -372.43,812.32 -372.43,822.57 v1(-370,825) ; v1(-370,905) J2.2 ; U4.GND@-348.03,-1194.68 -285.31,-1194.68 v1(-285,-1195) ; v1(-335,630) -331.57,630 -321.57,640 R28.2 v1(-290,590) ; v1(-275,325) C5.2 -234,326 v1(-234,364) ; J1.SH2 -266.58,1006.93 -234.3,1006.93 -225.98,998.62 J1.B1_A12 ; v1(-243.13,-89.88) -239.7,-89.88 -233.33,-83.5 SW2.4 -200.29,-87.38 v1(-200.29,-132.72) ; v1(-241.44,-364.29) -238.01,-364.29 -232.8,-369.5 -218.42,-369.5 SW2.3@-200,-387.91 ; v1(-200,20) -200,39.75 -192.8,46.96 U1.6 ; SW2.3 -200,-392.91 SW2.3@-200,-387.91 ; v1(-182.93,-343.07) -184.08,-343.07 -200,-359 SW2.3@-200,-387.91 ; C27.2 v1(-155,910) ; U8.29 -65.31,664.68 U8.3 -65.31,752.09 -57.94,759.46 -57.94,760.3 -53.84,764.4 -10.6,764.4 -4.85,770.15 -4.85,770.56 5,780.41 v1(5,783.84) ; R17.2 v1(-80,-200) ; v1(-80,65) R8.2 ; v1(-50,-945) -49.13,-945.87 U4.GND@0.39,-945.87 ; v1(-50,-890) -49.25,-890.75 U4.GND@0.39,-890.75 ; v1(-50,-835) -49.37,-835.63 U4.GND@0.39,-835.63 ; D1.5 -2.49,865 6.41,856.11 v1(6.41,835.09) ; R16.2 v1(-30,-200) ; v1(0,-795) 0.39,-795.39 U4.GND@0.39,-835.63 ; v1(0.39,-996.2) U4.GND@0.39,-945.87 ; R15.2 v1(20,-200) ; J1.A1_B12 25.98,998.62 34.3,1006.93 66.58,1006.93 J1.SH1 ; v1(55,-996.6) 55,-946.38 U4.GND@55.51,-945.87 ; v1(55,-795) 55.51,-795.51 U4.GND@55.51,-835.63 ; D1.2 v1(105,865) ; D1.3 102.6,902.4 v1(105,900) ; v1(110,-996.6) 110,-946.5 U4.GND@110.63,-945.87 ; v1(110,-795) 110.63,-795.63 U4.GND@110.63,-835.63 ; R6.2 v1(185,235) ; C7.2 180,285 v1(185,280) ; C16.2 150,-155 v1(166.51,-138.49) ; v1(155,-945) 154.13,-945.87 U4.GND@110.63,-945.87 ; v1(155,-890) 154.25,-890.75 U4.GND@110.63,-890.75 ; v1(155,-835) 154.37,-835.63 U4.GND@110.63,-835.63 ; v1(170,-100) R24.2 ; v1(182.24,1111.81) 185.57,1111.81 218.76,1145 C19.2 ; v1(205,800) 205,803.76 240,838.76 C18.2 C17.2 ; v1(207.44,533.69) C3.1 v1(207.44,612.56) ; v1(215,1030) U5.15@311.66,1030 ; v1(239.98,-204.48) 239.98,-149.94 SW1.4 v1(293.58,-146.42) ; v1(270,630) 294.13,605.87 U2.2 349.56,605.87 369.88,585.55 U2.13 ; v1(275,-1195) 275.31,-1194.68 U4.GND@340.94,-1194.68 ; U5.2 285.63,1003.97 U5.15@311.66,1030 ; U2.6 341.54,535 369.88,563.35 U2.13@369.88,573.04 ; U2.5 349.56,552.72 U2.13@369.88,573.04 ; U2.4 330.5,570.43 334.9,574.83 334.9,574.9 339.29,579.29 U2.13 ; v1(370,-430) 370,-447.01 382.99,-460 C12.2 ; v1(410,-1030) C14.2 C15.2 v1(460,-1030) ; C13.2 410,-632.12 422.25,-644.37 450.06,-644.37 450.47,-644.77 450.47,-664.53 v1(430,-685) ; R20.2 v1(420,275) ; v1(425,402.44) C4.1 ; U2.8 390.2,552.72 U2.13@369.88,573.04 ; R12.2 442.01,840 v1(486.6,840) ; v1@450,1030 U5.15 U5.15@311.66,1030 ; v1(455,1150) 450,1145 C21.2 C20.2 v1(455,1195) ; U3.18 482.48,-644.37 U3.25@499.8,-627.05 ; v1(485,-715) 501.38,-698.62 U3.20 501.38,-628.62 U3.25 501.38,-581.38 U3.11 ; v1(485,800) 485,796.57 475,786.57 C1.2 504.13,762.56 511.57,770 v1(515,770) ; U7.2 v1(510,150) ; v1(511.4,-201.06) 513.7,-198.76 513.7,-184.22 552.91,-145 555.08,-145 SW1.3 560.02,-149.94 v1(560.02,-204.48) ; v1(585,690) 585.35,689.65 C2.2 585.35,604.65 v1(601.86,588.14) 601.86,584.71 594.32,577.16 L2.2 ; v1(600,-805) 600,-842.01 R18.2 v1(602.99,-882.99) ; C11.2@623.34,-474.65 635,-462.99 v1(635,-430) ; b1.bv-@-525,1080 b1.bv- ; b1.bv-@-510,1100 b1.bv- ; b1.bv- b1.bv-@-505,1140 ; U4.GND@0.39,-945.87 U4.GND@0.39,-890.75 ; U4.GND@0.39,-890.75 U4.GND@55.51,-890.75 ; U4.GND@0.39,-890.75 U4.GND@0.39,-835.63 ; U4.GND@0.39,-835.63 U4.GND@55.51,-835.63 ; U4.GND@55.51,-945.87 U4.GND@55.51,-890.75 ; U4.GND@55.51,-945.87 U4.GND@110.63,-945.87 ; U4.GND@55.51,-890.75 U4.GND@55.51,-835.63 ; U4.GND@55.51,-890.75 U4.GND@110.63,-890.75 ; U4.GND@55.51,-835.63 U4.GND@110.63,-835.63 ; U4.GND@110.63,-945.87 U4.GND@110.63,-890.75 ; U4.GND@110.63,-890.75 U4.GND@110.63,-835.63 ; U2.13@369.88,573.04 U2.13
  Bottom Layer w7: e1.ref -392.5,150 -262.5,20 v1(-200,20)
  other v1: 445,1030
int: U3.12 U4.14 | length 307.2
  Top Layer w7: v1(278.81,-561.19) 295.31,-544.68 U4.14 ; v1(450,-520) 452.88,-520 463.35,-530.47 485.23,-530.47 485.63,-530.87 U3.12
  Layer 1 w7: v1(278.81,-561.19) 320,-520 v1(450,-520)
io12: led2.1 U4.20 | length 68.1
  Top Layer w7: led2.1 21.46,-429.45 U4.20
io13: led3.1 U4.21 | length 68.1
  Top Layer w7: led3.1 -28.54,-429.45 U4.21
io14: led4.1 U4.22 | length 68.1
  Top Layer w7: led4.1 -78.54,-429.45 U4.22
io15: led5.1 U4.8 | length 76.2
  Top Layer w7: U4.8 416.69,-844.68 led5.1
l1: L3.2 U5.8 U5.9 | length 209.8
  Top Layer w7: U5.9 U5.8 495.88,1085.12 518,1063 L3.2
l2: L3.1 U5.6 U5.7 | length 206.8
  Top Layer w7: U5.6 U5.7 421.85,974.88 425.35,978.38 553.62,978.38 L3.1
miso: U3.9 U4.17 U7.5 | length 1002.9
  Top Layer w7: U4.17 171.46,-541.46 v1(187.96,-557.96) ; v1(480,-60) 482.43,-57.57 482.43,-44.58 510,-17.01 U7.5 ; v1(515,-480) 532.87,-497.87 U3.9
  Layer 1 w7: v1(187.96,-557.96) 275.92,-470 501.57,-470 511.57,-480 v1(515,-480) 515,-285.78 480,-250.78 v1(480,-60)
mosi: U3.24 U4.12 | length 454.7
  Top Layer w10: v1(296.57,-645) 340.63,-645 U4.12 ; U3.24 564.37,-699.37 v1(580,-715)
  Layer 2 w10: v1(296.57,-645) 421.57,-770 525,-770 v1(580,-715)
NetC19_1: C19.1 U5.1 U5.12 U5.13 | length 378.7
  Top Layer w7: v1(215,1105) 272.83,1105 U5.13@285.63,1092.2 ; v1(227.28,957.46) 228.38,956.36 254.51,956.36 265.94,967.8 U5.1 ; C19.1 285.63,1144.37 U5.13@285.63,1092.2 ; U5.12 U5.13 U5.13@285.63,1092.2
  Layer 1 w7: v1(215,1105) 191.66,1081.66 191.66,993.09 v1(227.28,957.46)
NetJ2_1: J2.1 R13.2 | length 68.6
  Top Layer w10: J2.1 -309.76,956 -280,926.24 R13.2
NetJ2_5: J2.5 R14.2 | length 71.9
  Top Layer w7: R14.2 -340,847 J2.5
NetL1_2: L1.2 U2.1 | length 119.3
  Top Layer w10: L1.2 314.76,715.92 U2.1
NetL2_1: L2.1 U2.10 | length 135.2
  Top Layer w10: U2.10 426.06,587.09 457.91,587.09 490.06,554.94 490.06,520.63 L2.1
Netled1_2: led1.2 R13.1 | length 50
  Top Layer w10: R13.1 led1.2
Netled2_2: led2.2 R15.1 | length 60
  Top Layer w7: led2.2 R15.1
Netled3_2: led3.2 R16.1 | length 60
  Top Layer w7: led3.2 R16.1
Netled4_2: led4.2 R17.1 | length 60
  Top Layer w7: led4.2 R17.1
Netled5_2: led5.2 R18.1 | length 60
  Top Layer w7: led5.2 R18.1
NetR1_2: R1.2 U2.7 | length 109
  Top Layer w10: R1.2 355.28,490.75 355.28,500.53 372.15,517.4 401.65,517.4 419.25,535 U2.7
NetR26_1: R26.1 U8.9 | length 68
  Top Layer w10: R26.1 -215.75,670 -201.7,684.06 -178.23,684.06 U8.9
NetR29_2: R29.2 U9.1 | length 637
  Top Layer w10: U9.1 10.51,402.5 30.01,383 129.52,383 176.49,429.97 176.49,630.54 190.49,644.54 190.49,716.05 186.53,720 R29.2
NetR30_2: R30.2 U10.1 | length 294.4
  Top Layer w10: U10.1 98,426.48 150,478.48 150,640 159.71,649.71 159.71,666.71 R30.2
p7: P2.7 U4.39 | length 830.2
  Top Layer w7: v1(-400,-1140) -395.31,-1144.68 U4.39
  Layer 1 w7: P2.7 -560,-469.37 -495,-534.37 -495,-1045 v1(-400,-1140)
p8: P2.8 U4.38 | length 883.1
  Top Layer w10: v1(-400.31,-1094.68) U4.38
  Layer 1 w7: P2.8 -460,-430 -460,-1035 v1(-400.31,-1094.68)
p9: P2.9 U4.15 | length 948.3
  Top Layer w7: v1(-335,-230) -260,-230 -95,-395 31.65,-395 46.65,-410 197.8,-410 271.46,-483.66 U4.15
  Layer 2 w7: P2.9 v1(-335,-230)
p10: P2.10 U4.4 | length 1351.9
  Top Layer w7: v1(275,-1025) 294.69,-1044.68 U4.4
  Layer 1 w7: P2.10 -520,-130 23.34,-673.34 23.34,-796.35 140.33,-913.34 163.34,-913.34 v1(275,-1025)
p11: P2.11 U4.5 | length 1421.8
  Top Layer w7: v1(275,-975) 294.69,-994.68 U4.5
  Layer 1 w7: P2.11 -462.99,-30 225,-717.99 225,-925 v1(275,-975)
p12: P2.12 U4.6 | length 1477.3
  Top Layer w7: v1(275,-925) 294.69,-944.68 U4.6
  Layer 1 w7: P2.12 -453.67,70 125,-508.67 125,-550 275,-700 v1(275,-925)
p13: P2.13 U4.34 | length 1251.5
  Top Layer w7: v1(-415,-895) -414.69,-894.68 U4.34
  Bottom Layer w7: P2.13 -560,130.63 -602.87,87.76 -602.87,-747.76 -563.5,-787.13 -522.87,-787.13 v1(-415,-895)
p14: P2.14 U4.35 | length 1448.8
  Top Layer w7: v1(-415,-940) -410.31,-944.68 U4.35
  Bottom Layer w7: P2.14 -625,205 -625,-825.63 -563.5,-887.13 -467.87,-887.13 v1(-415,-940)
p15: P2.15 U4.26 | length 1083.7
  Top Layer w10: v1(-301.96,-435.49) -301.96,-438.11 -291.26,-448.81 -291.26,-482.76 U4.26
  Layer 1 w10: P2.15 -620,310 -620,-32.75 -569.49,-83.26 -506.74,-83.26 v1(-470,-120)
  Bottom Layer w10: v1(-470,-120) -470,-293.37 -343.53,-419.84 -320.16,-419.84 -304.51,-435.49 v1(-301.96,-435.49)
pg: R10.2 U5.14 | length 107.2
  Top Layer w7: R10.2 209.97,1057.99 237.09,1085.12 U5.14
regout: C12.1 U3.10 | length 109.2
  Top Layer w7: C12.1@465,-455 468.25,-455 480.5,-467.25 480.5,-490.34 517.13,-526.97 U3.10
rg1: R2.1 U1.2 | length 90.5
  Top Layer w7: R2.1 -284.25,177.99 -264.05,157.8 U1.2
rg2: R2.2 U1.3 | length 89.2
  Top Layer w7: R2.2 -305.21,115 -288,132.2 U1.3
rts: R30.1 U8.24 U9.2 | length 370
  Top Layer w10: U9.2 -63.71,477.5 65.29,606.5 65.29,620.16 ; U8.24 39.55,625.32 44.71,620.16 65.29,620.16 ; R30.1 96.75,670 86,659.25 86,640.87 65.29,620.16
rx: P2.2 U4.36 U8.25 | length 2135.7
  Top Layer w10: P2.2 -495.31,-994.68 U4.36 -275.31,-994.68 v1(-275,-995) ; U8.25 v1(55,645)
  Bottom Layer w7: v1(-275,-995) -275,-300 55,30 v1(55,645)
sclk: U3.23 U4.7 U7.4 | length 1311.4
  Top Layer w6: U4.7 355.66,-879.97 390.82,-879.97 ; v1(406.97,-906.97) 390.82,-890.82 390.82,-879.97 ; v1(440,-60) 442.62,-57.38 442.62,-46.99 472.6,-17.01 U7.4 ; U3.23 548.62,-720.43 454.5,-814.55 454.5,-851.44 425.98,-879.97 390.82,-879.97
  Bottom Layer w6: v1(406.97,-906.97) 406.97,-496.93 440,-463.9 v1(440,-60)
tck: P2.6 U4.30 | length 296.6
  Top Layer w7: P2.6 -552.59,-537.41 -552.59,-565.42 -423.33,-694.68 U4.30
tdi: P2.4 U4.32 | length 238.8
  Top Layer w7: P2.4 -495.31,-794.68 U4.32
tdo: P2.5 U4.31 | length 259.5
  Top Layer w7: P2.5 -445.31,-744.68 U4.31
tms: P2.3 U4.33 | length 218.1
  Top Layer w7: P2.3 -374.53,-830 -359.84,-844.68 U4.33
tx: P2.1 U4.37 U8.26 | length 2299.8
  Top Layer w10: P2.1 -558.03,-1031.97 -360.75,-1031.97 U4.37 -235.31,-1044.68 v1(-235,-1045) ; U8.26 35.9,664.68 53.98,682.76 53.98,687.37 v1(55.83,689.22)
  Bottom Layer w7: v1(-235,-1045) -213.66,-1023.66 -213.66,-300.65 120,33.01 120,625.05 v1(55.83,689.22)
usbDN: D1.4 J1.A7 U8.5 | length 558.3
  Top Layer w7: v1(-125,1040) -109.84,1024.84 -109.84,961.66 -104.69,956.5 U8.5 ; D1.4 v1(-36.26,936.26)
  Layer 1 w7: v1(-125,1040) -100,1065 -60,1065 -36.26,1041.26 v1(-36.26,936.26)
usbDP: D1.6 J1.A6 U8.4 | length 617.2
  Top Layer w7: U8.4 -85,760.9 -90.16,766.06 J1.A6 -90.16,1024.84 v1(-75,1040) ; v1(-48.49,788.49) -48.49,791.51 -36.26,803.74 D1.6
  Layer 1 w7: v1(-75,1040) -75,1036.57 -65,1026.57 -65,805 v1(-48.49,788.49)
v1: C5.1 R3.2 R4.1 | length 107
  Top Layer w7: R3.2 C5.1 R4.1
v2: C6.1 R4.2 R5.1 | length 154.9
  Top Layer w7: R5.1 -106.75,275 -69,312.75 -62.25,312.75 R4.2 10,325 C6.1
v3: C7.1 R5.2 U1.14 | length 293.1
  Top Layer w7: U1.14 -167.2,229.05 -153.82,242.43 -59.9,242.43 -47.01,255.33 R5.2 -1.65,275 8.35,285 C7.1
v4: C6.2 C8.1 U1.12 U1.13 | length 218.6
  Top Layer w7: U1.13 -141.61,206.72 -118.28,183.39 U1.12 -61.61,183.39 C8.1 -40.33,204.67 -40.33,214.67 -18.49,236.51 7.75,236.51 20,248.76 C6.2
v5: C8.2 C9.1 R6.1 | length 190
  Top Layer w7: C8.2 38.99,195 64.5,220.52 64.5,222.75 76.75,235 80,231.75 C9.1
v6: C9.2 C10.1 R7.1 | length 121.2
  Top Layer w7: R7.1 20,7.99 C10.1 C9.2
v7: C10.2 R8.1 U1.11 | length 268.1
  Top Layer w7: U1.11 -83.74,157.8 ; -83.74,157.8 -73.24,168.3 -17.06,168.3 20,131.24 C10.2 R8.1 -40,131.24 -66.56,157.8 -83.74,157.8
vbus: R27.2 R28.1 U8.8 | length 225.8
  Top Layer w7: R27.2 -276.24,790 -292.34,773.9 -295.23,773.9 -308.9,760.23 -308.9,725.14 -290,706.24 R28.1 -288.94,704.06 U8.8
vin1+: R24.1 R25.1 U6.3 | length 166.8
  Top Layer w7: R24.1 R25.1 197.05,100 212.2,115.16 U6.3
vin2+: R22.2 R23.2 U6.5 | length 102.8
  Top Layer w7: R22.2 R23.2 302.25,50 314.5,62.25 U6.5
vin2-: R20.1 R21.2 U6.6 | length 144.8
  Top Layer w7: U6.6 347.08,115.16 365,133.08 R21.2 R20.1
Vn: C4.2 P2.19 U1.5 U2.9 U6.4 U6.9 | length 2437.2
  Top Layer w10: v1(-255,75) -253.56,73.56 -218.61,73.56 -218.39,73.33 U1.5 ; U6.4 259.47,95.47 275,111 275,210 v1(295,230) ; v1(388.84,492.56) C4.2 445.31,512.87 445.31,557.87 433.81,569.37 426.06,569.37 U2.9
  Layer 2 w10: P2.19 -485.16,695.16 -216.54,695.16 -197.63,714.07 265.93,714.07 388.84,591.16 v1(388.84,492.56) 388.84,398.84 295,305 ; v1(-255,75) -220,110 -66.18,110 -58.69,102.51 92.51,102.51 295,305 ; v1(295,230) 295,305
vout: R3.1 U1.15 | length 75.7
  Top Layer w7: R3.1 -229.74,275 -217.5,262.75 -217.5,253.75 -192.8,229.05 U1.15
vout1: R23.1 R25.2 U6.1 | length 310.3
  Top Layer w7: R25.2 178.46,154.53 U6.1 235.5,194.5 v1(235,195) ; v1(195,55) 198.43,55 203.43,50 R23.1
  Layer 1 w7: v1(195,55) 195,155 v1(235,195)
Vp: C3.2 P2.18 U1.16 U2.3 U6.8 U7.1 | length 2597.3
  Top Layer w7: U1.16 -218.39,194.95 -203.31,179.87 v1(-184.77,179.87) ; U2.3 306.89,588.15 293.74,575 C3.2 262.56,547.56 245.58,530.58 v1(243.25,530.58) 243.25,435 275.14,403.11 ; v1(321.16,260) 275.14,306.01 275.14,403.11 ; U7.1 547.4,237.6 405,380 298.25,380 275.14,403.11
  Top Layer w10: U6.8 314.5,184.37 321.16,191.02 v1(321.16,260)
  Layer 2 w10: P2.18 -398.85,508.85 221.52,508.85 v1(243.25,530.58) 243.25,393.25 29.87,179.87 v1(-184.77,179.87)
pads on no net: J1. J1.A5 J1.A8 J1.B5 J1.B6 J1.B7 J1.B8 SW1.1 U1.8 U1.10 U3.2 U3.3 U3.4 U3.5 U3.6 U3.7 U3.14 U3.15 U3.16 U3.17 U3.19 U3.21 U4.10 U4.11 U4.16 U4.18 U4.19 U4.23 U4.24 U4.25 U4.28 U4.29 U8.1 U8.2 U8.10 U8.11 U8.12 U8.13 U8.14 U8.15 U8.16 U8.17 U8.18 U8.19 U8.20 U8.21 U8.22 U8.23 U8.27

## Polygon pours and split planes (outlines as drawn)
gnd on Top Layer "GND_L01_P014" (solid, pour order 14): -675,1115 -505,1285 500,1285 675,1110 675,-25 645,-55 100,-55 100,-450 315,-450 375,-510 375,-1250 -475,-1250 -675,-1050
3v3 on Top Layer "3V3_L01_P010" (solid, pour order 10): 100,-55 675,-55 675,-1040 475,-1240 375,-1240 375,-510 315,-450 100,-450
gnd on Layer 2 "GND_L03_P004" (solid, pour order 4): -500,1275 -675,1100 -675,-1050 -500,-1225 500,-1225 675,-1050 675,1100 500,1275
gnd on Layer 1 "GND_L02_P012" (solid, pour order 12): -675,1100 -500,1275 500,1275 675,1100 675,-1050 475,-1250 -475,-1250 -675,-1050
gnd on Bottom Layer "GND_L04_P013" (solid, pour order 13): -675,1100 -500,1275 500,1275 675,1100 675,-1050 475,-1250 -475,-1250 -675,-1050

## Silkscreen, mask and mechanical layers (free items; w line width, h text height)
Mechanical 1:
  the board outline again, w10

## Dimensions
485,-1250 to 515,1275 on Mechanical 1
675,-1060 to -675,-1100 on Mechanical 1

## Text inside footprints (layer, text, board x,y; h text height)
U4: Top 3D Body "ANTENNA" at 135,-1345 h40 r180